# Altium PCB CarteTxMoteurvv.PCBDOC
Units mm, origin at the board's own origin, x right, y up, seen from the top; angles counter-clockwise.
Board outline 299.72 x 199.9 mm, 2 copper layers (Top Layer, Bottom Layer); 12 components, 13 nets, 46 pads, 15 vias.
Unrouted connection lines stored in the file: 1.
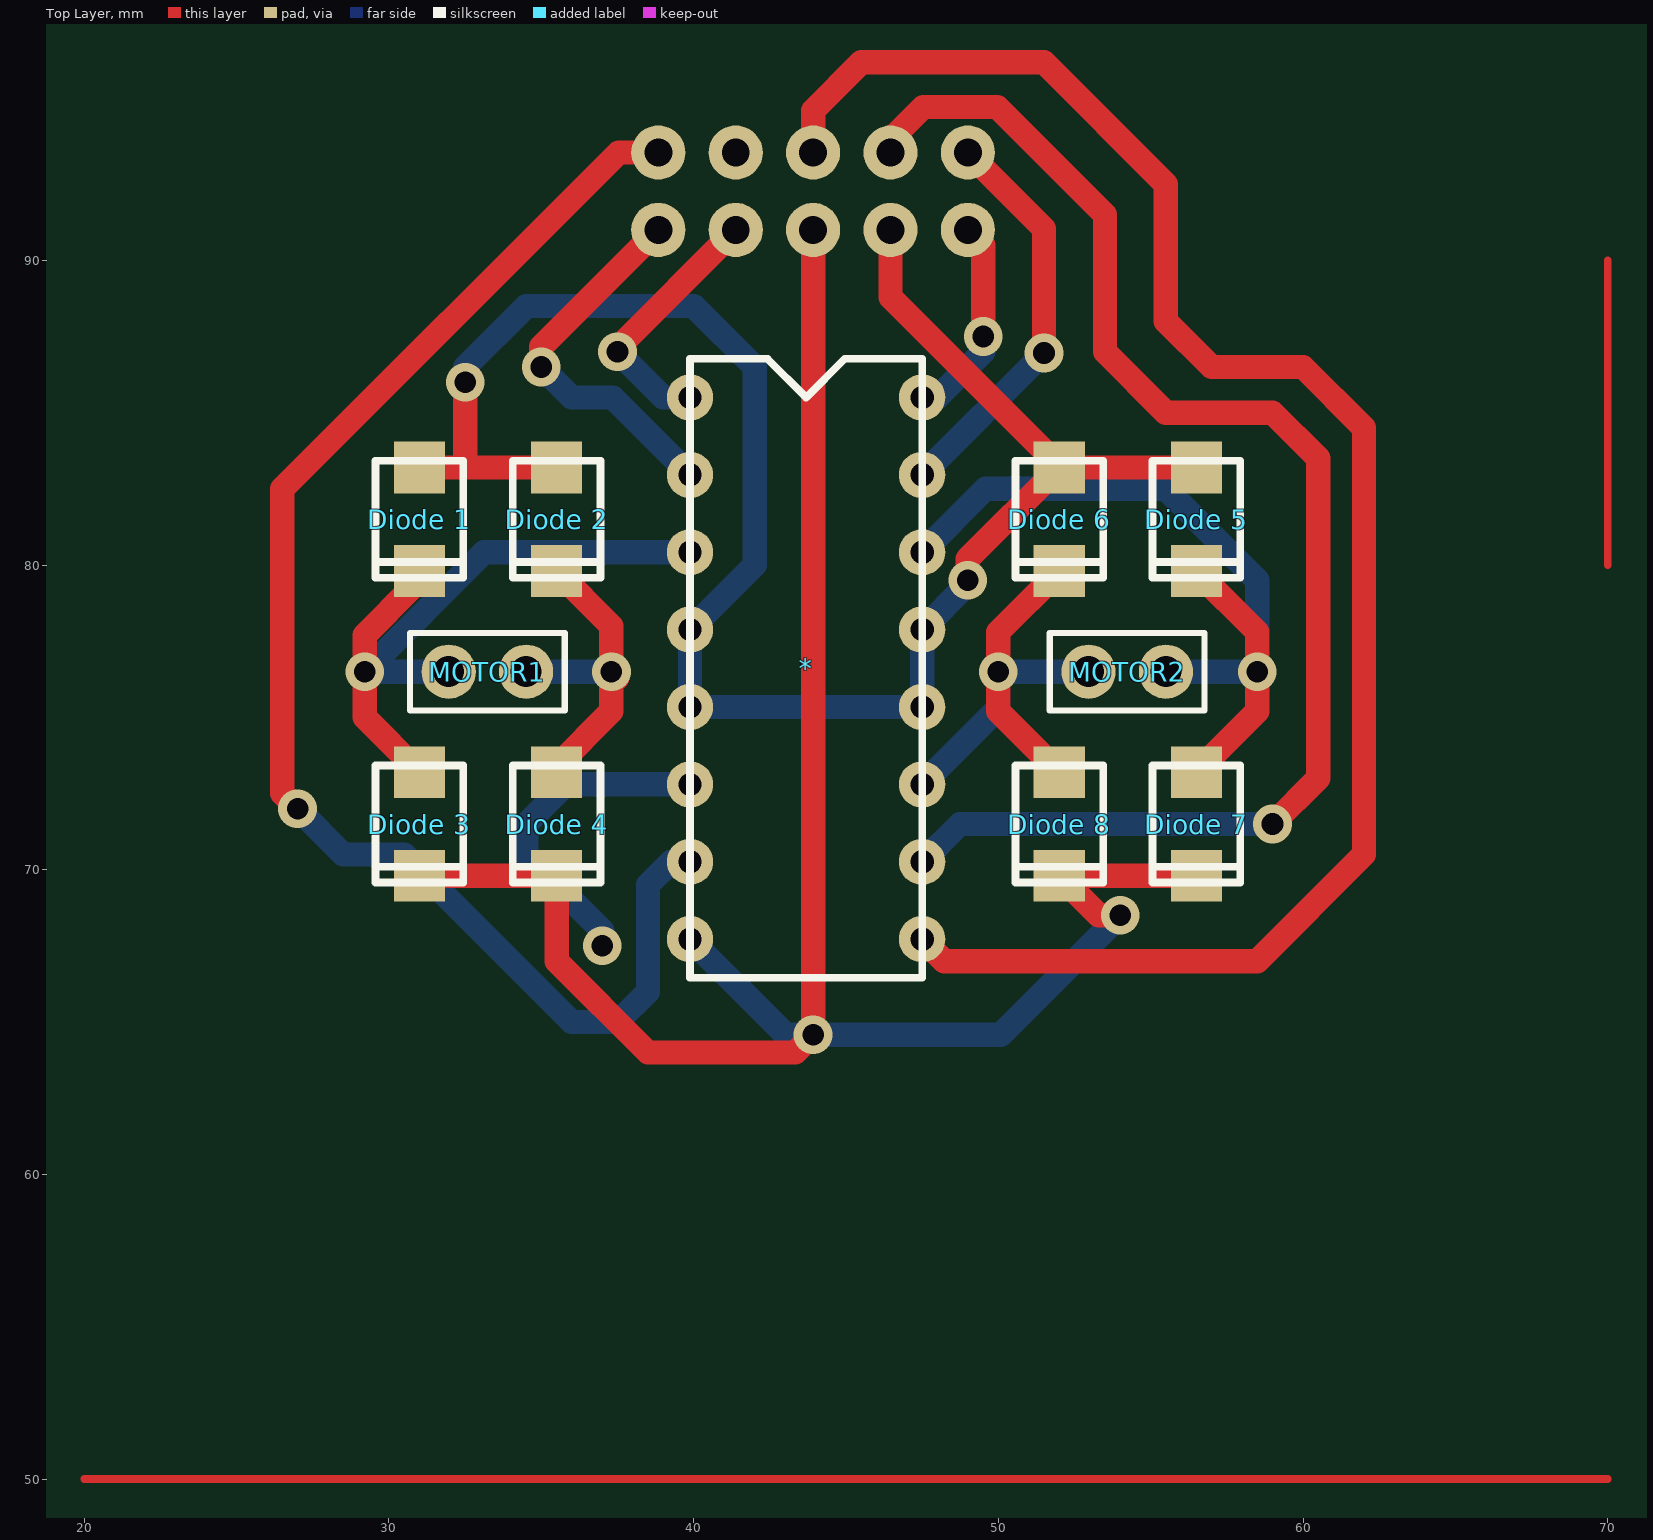
[diagram p0: Top Layer view]
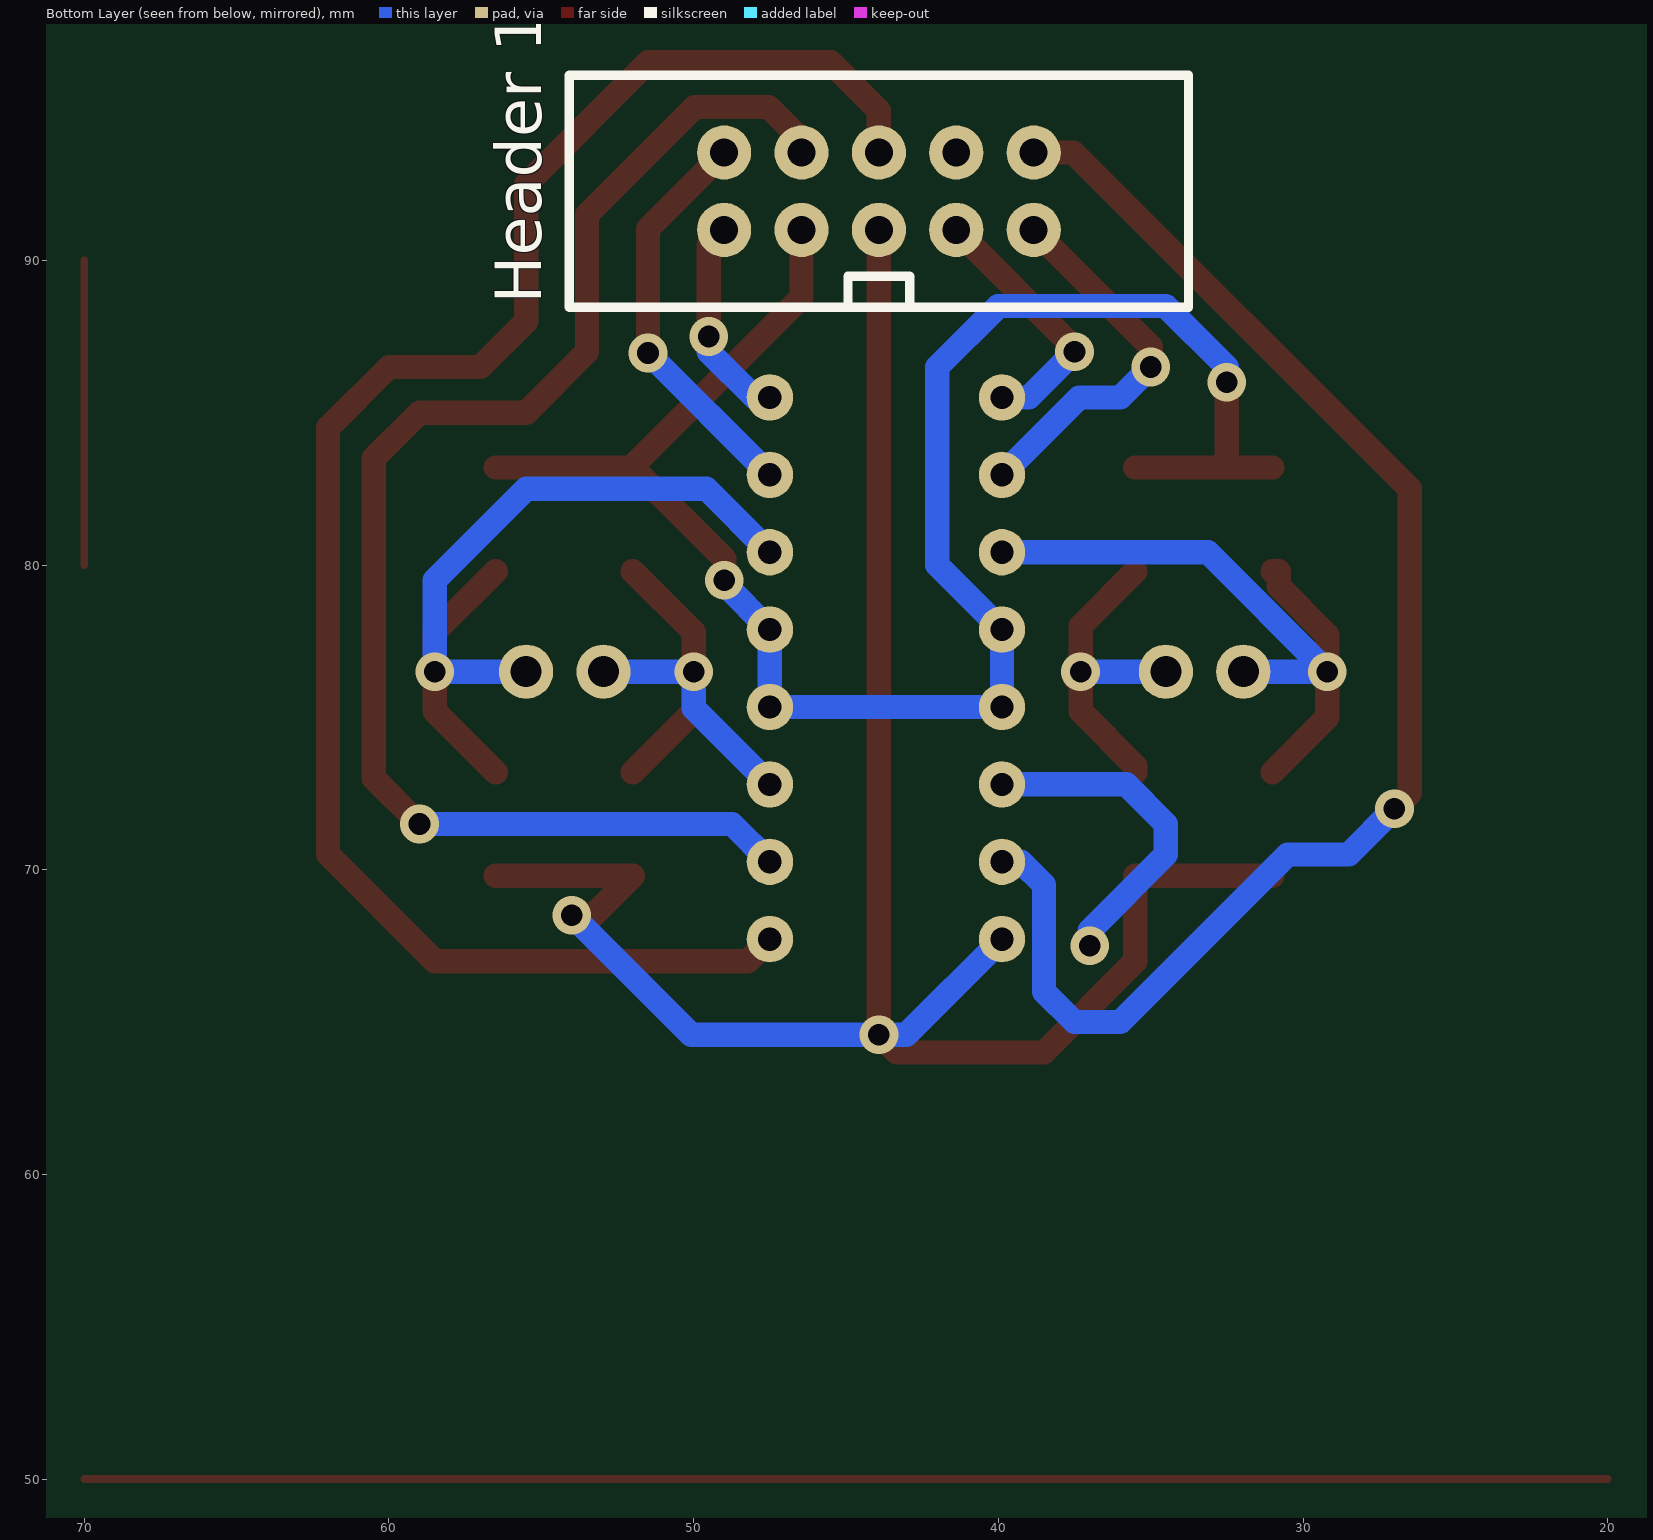
[diagram p1: Bottom Layer view, seen from below]

## Layer stack, top to bottom
Top Solder: solder mask 0.0102, Solder Resist, Dk 3.5
Top Layer: signal copper 0.0356
Dielectric1: dielectric 0.32, FR-4, Dk 4.8
Bottom Layer: signal copper 0.0356
Bottom Solder: solder mask 0.0102, Solder Resist, Dk 3.5

## Board outline
-20.497,-23.403 279.223,-23.403 279.223,176.495 -20.497,176.495

## Design rules (kind name [scope] priority, off if disabled: settings)
Clearance Clearance_bottom_polygon [OnLayer('Bottom Layer') Or OnLayer('Multi-Layer') vs OnLayer('Bottom Layer')  And  InPoly] p1: gap=0.508
Clearance Clearance_top_polygon [OnLayer('Top Layer')  Or OnLayer('Multi-Layer') vs OnLayer('Top Layer') And InPoly] p2: gap=0.508
Clearance Clearance_bottom [OnLayer('Bottom Layer') Or OnLayer('Multi-Layer') vs OnLayer('Bottom Layer')  And Not InPoly] p3: gap=0.203
Clearance Clearance_top [OnLayer('Top Layer')  Or OnLayer('Multi-Layer') vs OnLayer('Top Layer') And Not InPoly] p4: gap=0.203
Clearance Clearance_pad_to_pad [OnLayer('Multi-Layer') vs OnLayer('Multi-Layer')] p5: gap=0.254
ComponentClearance ComponentClearance_bottom [OnLayer('Bottom Overlay') vs OnLayer('Bottom Overlay')] p1: gap=0 collisioncheckmode=3 verticalgap=0.254 showdistances=FALSE
ComponentClearance ComponentClearance_top [OnLayer('Top Overlay') vs OnLayer('Top Overlay')] p2: gap=0 collisioncheckmode=3 verticalgap=0.254 showdistances=FALSE
FabricationTestPointUsage TestPointUsage [All] p1: valid=0 allowmultiple=FALSE
FabricationTestpoint Testpoint [All] p1: side=3 testpointundercomponent=TRUE minsize=1.016 maxsize=2.54 preferedsize=1.524 minholesize=0 maxholesize=1.016 preferedholesize=0.813 testpointgrid=0.025 allowsidetop=TRUE allowsidebottom=TRUE usegrid=TRUE gridtolerance=0
HoleSize [All] p1: absolutevalues=TRUE maxlimit=25.4 minlimit=0.406 maxpercent=80.000 minpercent=20.000
MinimumAnnularRing [PadXSize_AllLayers = PadYSize_AllLayers] p1: minimumring=0.203
PermittedLayers [All] p1: toplayerpermitted=TRUE bottomlayerpermitted=TRUE
PolygonConnect [All] p1: connectstyle=Relief reliefconductorwidth=0.61 reliefentries=4 polygonreliefangle="90 Angle" airgapwidth=0.254
RoutingVias [All] p1: holewidth=0.406 width=0.813 viastyle="Through Hole" minholewidth=0.4 minwidth=0.8 maxholewidth=0.6 maxwidth=10
SMDToPlane [All] p1: distance=0
SolderMaskExpansion [All] p1: expansion=0.102
ViasUnderSMD [All] p1: allowed=FALSE
Width Width_botom_top [OnLayer('Bottom Layer') or OnLayer('Top Layer')] p1: maxlimit=254 minlimit=0.254 preferedwidth=0.813 minimp=50.000000 maximp=50.000000 favimp=50.000000
25 further rules are at their usual default settings.

## Components (designator, comment, footprint, x,y, rotation, side; value= is the part's Value field where it differs from the comment)
* "L293NE" L293NE 47.5,85.5 r0 top
"Diode 1" "Diode ss16" "Diode ss16" 31,81.5 r90 top
"Diode 2" "Diode ss16" "Diode ss16" 35.5,81.5 r90 top
"Diode 3" "Diode ss16" "Diode ss16" 31,71.5 r90 top
"Diode 4" "Diode ss16" "Diode ss16" 35.5,71.5 r90 top
"Diode 5" "Diode ss16" "Diode ss16" 56.5,81.5 r90 top
"Diode 6" "Diode ss16" "Diode ss16" 52,81.5 r90 top
"Diode 7" "Diode ss16" "Diode ss16" 56.5,71.5 r90 top
"Diode 8" "Diode ss16" "Diode ss16" 52,71.5 r90 top
"Header 10" "comment" HE10-10V 49,91 r90 bottom
MOTOR1 "JUMPER2" JMP2-100 34.5,76.5 r180 top
MOTOR2 "JUMPER2" JMP2-100 55.5,76.5 r180 top

## Footprints (in the part's own frame and the unit in brackets; to place one, negate y for a bottom-side part, rotate by r counter-clockwise, add the part's x,y. Pads: shape width x height; smd on the part's side, far side on the other; paste and mask are expansions set on the pad)
"Diode ss16" [mm]
  rect 1.7x1.68 smd: +(1.7,0) -(-1.7,0)
  silkscreen extent -1.92,-1.44 1.92,1.44
HE10-10V [mil]
  round 70 hole 36: 1(0,0) 2(100,0) 3(0,-100) 4(100,-100) 5(0,-200) 6(100,-200) 7(0,-300) 8(100,-300) 9(0,-400) 10(100,-400)
  silkscreen extent -100,-600 200,200
JMP2-100 [mil]
  round 70 hole 40: 1(0,0) 2(100,0)
  silkscreen extent -50,-50 150,50
L293NE [mil]
  round 60 hole 30: 1(-300,0) 2(-300,-100) 3(-300,-200) 4(-300,-300) 5(-300,-400) 6(-300,-500) 7(-300,-600) 8(-300,-700) 9(0,0) 10(0,-100) 11(0,-200) 12(0,-300) 13(0,-400) 14(0,-500) 15(0,-600) 16(0,-700)
  silkscreen extent -300,-750 0,50

## Part data
"Header 10": library part HE10-10, "10-pin connector"
MOTOR1 MOTOR2: "cavalier 1 position"

## Via types
v1: diameter 1.27, hole 0.711, Top Layer to Bottom Layer, 15 vias

## Nets (pads, with @x,y where several pads share a name; then routed paths per layer and width w, separated by ;. In a path a pad name is that pad's centre, name@x,y a point inside that pad or via, vN(x,y) a via of type N, cw(c..) or ccw(c..) an arc to the next point about the centre after c; other vN are vias at no path point)
ENABLE1: "Header 10.7" *.1 | length 8.6
  Top Layer w0.8: v1(37.5,87) 37.5,87.12 41.38,91
  Bottom Layer w0.8: v1(37.5,87) 39,85.5 *.1
ENABLE2: "Header 10.6" *.16 | length 58
  Top Layer w0.8: 43.92,93.54 43.92,94.92 45.5,96.5 51.5,96.5 55.5,92.5 55.5,88 57,86.5 60,86.5 62,84.5 62,70.5 58.5,67 48.22,67 *.16
GND: "Diode 1.+" "Diode 2.+" "Diode 5.+" "Diode 6.+" "Header 10.3" *.4 *.5 *.12 *.13 | length 62.9
  Top Layer w0.8: 31,83.2 32.5,83.2 ; v1(32.5,86) 32.5,83.2 ; 35.5,83.2 32.5,83.2 ; 46.46,91 46.46,88.789 52,83.249 52,83.2 ; v1(49,79.5) 49,80.2 52,83.2 ; 56.5,83.2 52,83.2
  Bottom Layer w0.8: v1(32.5,86) 32.5,86.5 34.5,88.5 40,88.5 42,86.5 42,80 *.4 *.5 *.13 *.12 49,79.38 v1(49,79.5)
MOTOR1_IN1: "Header 10.9" *.2 | length 12.4
  Top Layer w0.8: v1(35,86.5) 35,87.16 38.84,91
  Bottom Layer w0.8: v1(35,86.5) 36,85.5 37.34,85.5 *.2
MOTOR1_IN2: "Header 10.10" *.7 | length 48
  Top Layer w0.8: v1(27,72) 26.5,72.5 26.5,82.5 37.54,93.54 38.84,93.54
  Bottom Layer w0.8: v1(27,72) 28.5,70.5 30.5,70.5 36,65 37.5,65 38.5,66 38.5,69.5 39.26,70.26 *.7 *.7@39.64,70.5
MOTOR2_IN1: "Header 10.2" *.10 | length 13.3
  Top Layer w0.8: 49,93.54 51.5,91.04 v1(51.5,86.96)
  Bottom Layer w0.8: *.10 v1(51.5,86.96)
MOTOR2_IN2: "Header 10.4" *.15 | length 47
  Top Layer w0.8: 46.46,93.54 46.46,93.96 47.532,95.032 49.968,95.032 53.5,91.5 53.5,87 55.5,85 59,85 60.5,83.5 60.5,73 v1(59,71.5)
  Bottom Layer w0.8: *.15 48.74,71.5 v1(59,71.5)
Net*_3: "Diode 1.-" "Diode 3.+" *.3 MOTOR1.2 | length 23.3
  Top Layer w0.8: 31,73.2 29.2,75 v1(29.2,76.5) 29.2,77.7 30.8,79.3 30.8,79.8 31,79.8
  Bottom Layer w0.8: MOTOR1.2 v1(29.2,76.5) 33.12,80.42 *.3
Net*_6: "Diode 2.-" "Diode 4.+" *.6 MOTOR1.1 | length 22.1
  Top Layer w0.8: 35.5,73.2 35.5,73.4 37.3,75.2 v1(37.3,76.5) ; 35.5,79.8 37.3,78 v1(37.3,76.5) ; v1@37.5,76.3 v1(37.3,76.5)
  Bottom Layer w0.8: MOTOR1.1 v1(37.3,76.5) ; v1(37,67.5) 37,68 34.5,70.5 34.5,71.5 35.8,72.8 *.6
Net*_11: "Diode 5.-" "Diode 7.+" *.11 MOTOR2.1 | length 27.4
  Top Layer w0.8: 56.5,73.2 58.5,75.2 v1(58.5,76.5) 58.5,77.8 56.5,79.8
  Bottom Layer w0.8: *.11 49.58,82.5 55.5,82.5 58.5,79.5 v1(58.5,76.5) MOTOR2.1
Net*_14: "Diode 6.-" "Diode 8.+" *.14 MOTOR2.2 | length 16
  Top Layer w0.8: 52,73.2 50,75.2 v1(50,76.5) 50,77.8 52,79.8
  Bottom Layer w0.8: *.14 50,75.3 v1(50,76.5) MOTOR2.2
"VCC1 5V": "Header 10.1" *.9 | length 6.3
  Top Layer w0.8: 49,91 49.5,90.5 v1(49.5,87.5)
  Bottom Layer w0.8: *.9 48,85.5 v1@49.5,87
"VCC2 8V": "Diode 3.-" "Diode 4.-" "Diode 7.-" "Diode 8.-" "Header 10.5" *.8 | length 67.7
  Top Layer w0.8: 31,69.8 35.5,69.8 35.5,67 38.5,64 43.34,64 v1(43.92,64.58) 43.92,91 ; v1(54,68.5) 53.3,68.5 52,69.8 56.5,69.8
  Bottom Layer w0.8: *.8 43.02,64.58 v1(43.92,64.58) 50.08,64.58 v1(54,68.5)
pads on no net: "Header 10.8"
copper on no net: | length 60
  Top Layer w0.254: 20,50 70,50 ; 70,80 70,90

## Keep-outs
Keep-Out Layer:
  rectangle: -19.537,-19.743 -14.537,180.257
  rectangle: -14.537,-19.743 275.463,-14.743
  rectangle: 270.463,-14.743 275.463,180.257
  rectangle: -14.537,175.257 270.463,180.257

## Silkscreen, mask and mechanical layers (free items; w line width, h text height)
Mechanical 1:
  lines w0.254: 25,67.5 25,92.5 30,97.5 60,97.5 65,92.5 65,67.5 60,62.5 30,62.5 25,67.5